# EAGLE board rocket-logger-merged (EAGLE 6.2)
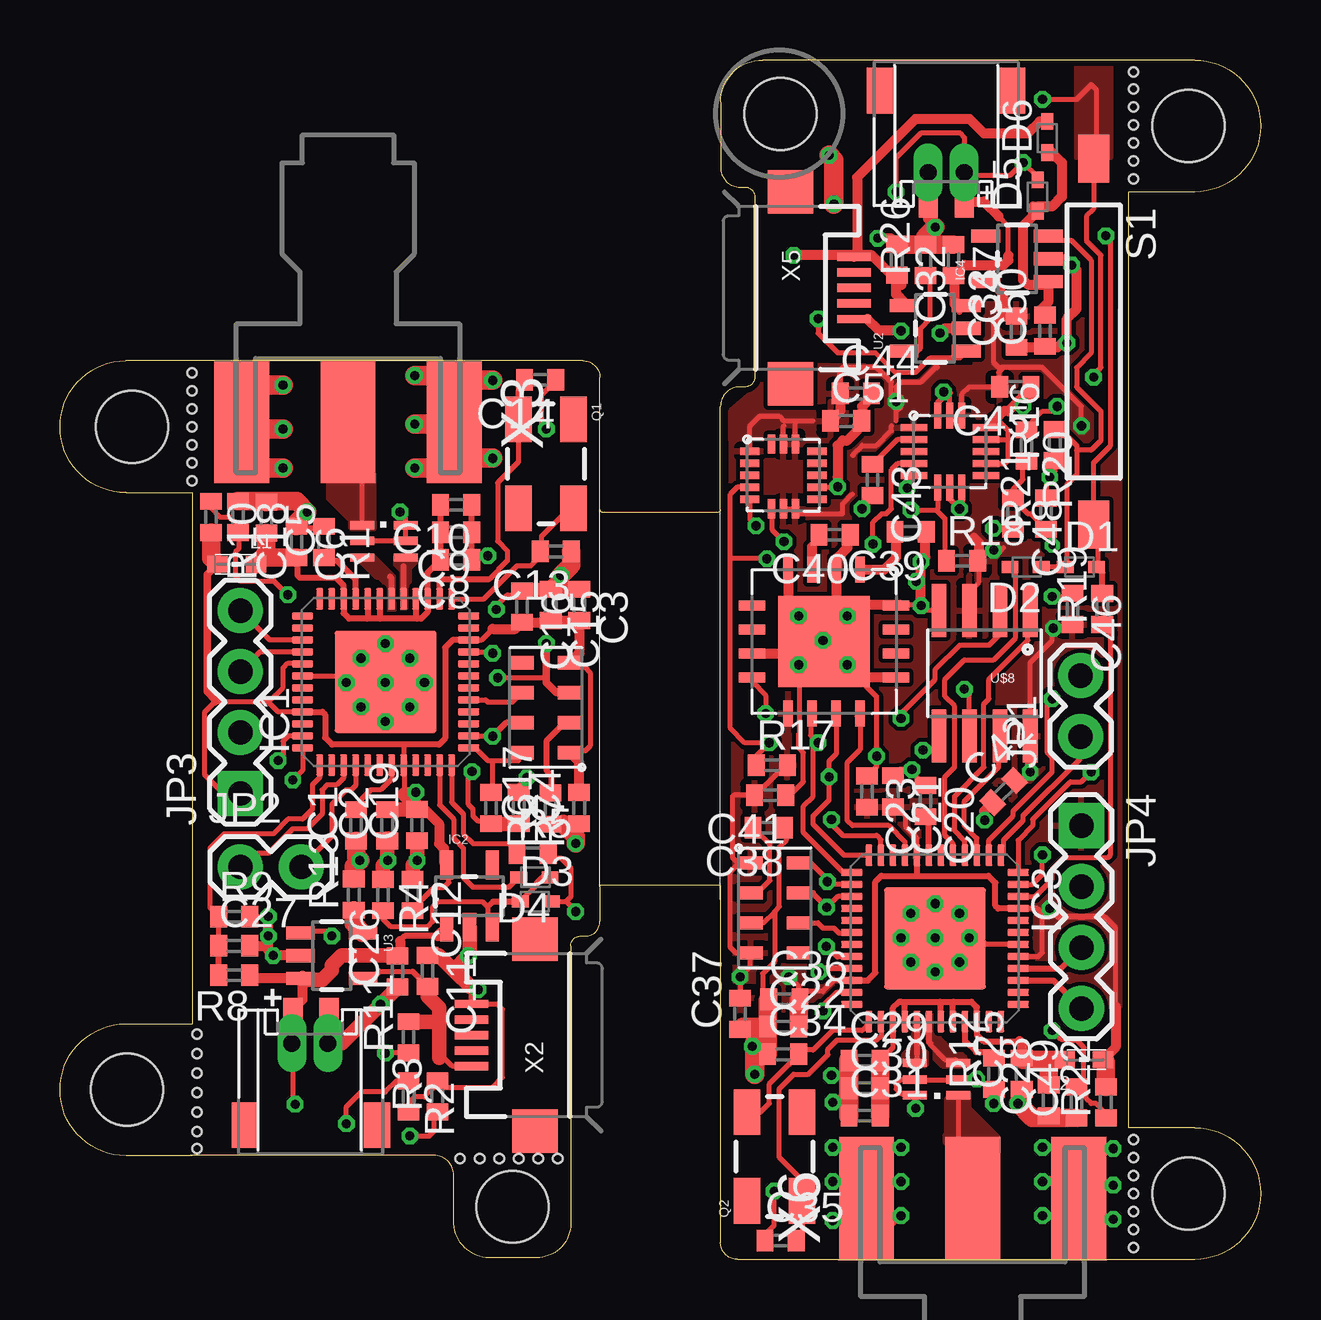
[diagram p0: board, top side]
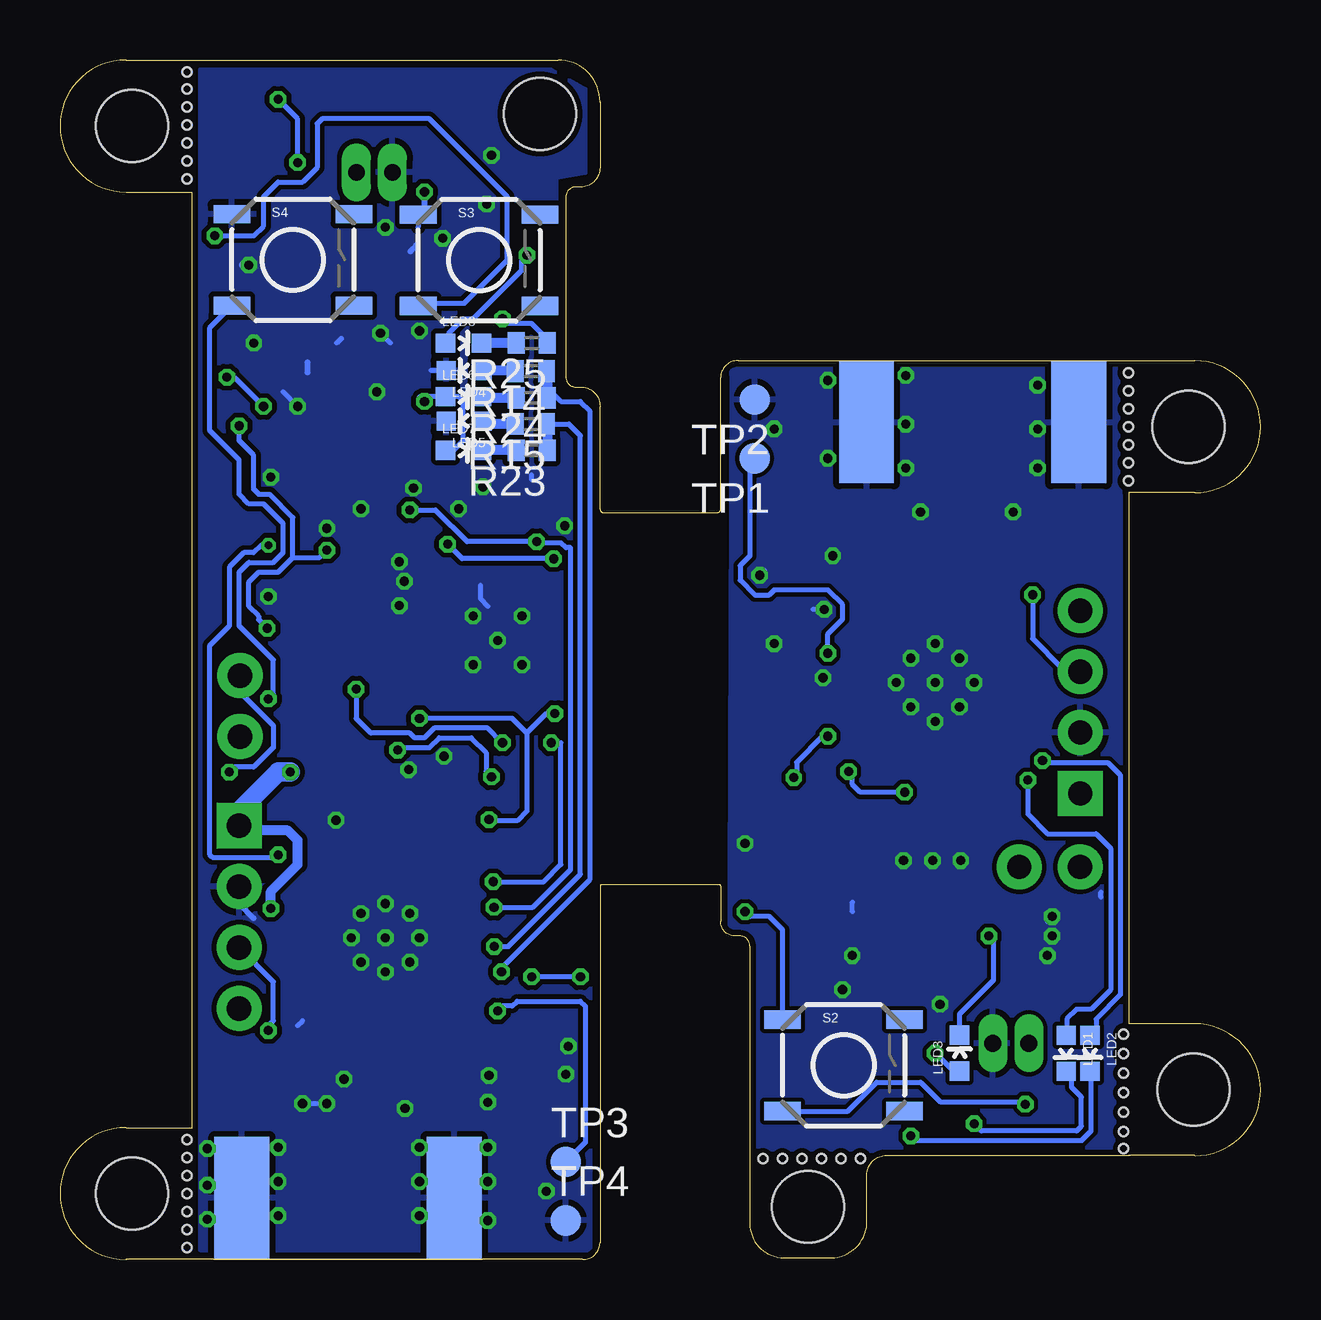
[diagram p1: board, bottom side, seen from below]

Size 50.02 x 50 mm. Coordinates in mm from the lower left corner, seen from the top.
Outline: 5.43,4.34 15.59,4.34 arc-90 16.4,3.53 16.4,1.49 arc90 18.03,0.07 19.86,0.07 arc90 21.28,1.49 21.28,13.08 arc-90 21.69,13.48 21.89,13.48 arc90 22.5,14.08 22.5,15.57 arc-90 22.54,15.61 27.52,15.61 27.52,0.7 arc90 28.24,0 47.28,0
Outline: 2.75,4.34 5.5,4.34
Outline: 2.75,4.33 arc-90 0,7.08 arc-90 2.75,9.83 5.5,9.83 5.5,31.96 2.75,31.96 arc-90 0,34.71 arc-90 2.75,37.47 21.77,37.47 arc-90 22.5,36.77 22.5,31.27 arc90 22.62,31.14 27.39,31.14 arc90 27.52,31.27 27.52,35.56 arc-90 28.34,36.37 28.54,36.37 arc90 28.95,36.78 28.95,44.3 arc90 28.54,44.7 28.34,44.7 arc-90 27.52,45.52 27.52,48.25 arc-90 29.27,50 47.27,50 arc-90 50.02,47.25 arc-90 47.27,44.5 44.52,44.5 44.52,5.5 47.27,5.5 arc-90 50.02,2.75 arc-90 47.27,0
Copper layers (1*16): Top 0.035mm / dielectric 1.5mm / Bottom 0.035mm
Design rules: minimum track width 6mil, minimum drill 12mil, track to track 6mil, track to pad 6mil, pad to pad 6mil, via to via 6mil, smd to smd 0mil, copper to edge 10mil, drill to drill 10mil, minimum pad ring 10mil, minimum via ring 6mil, stop-mask expansion 2mil, vias tented up to drill 25mil, thermal gap 10mil
Holes 3 mm at 3,34.71 18.85,2.2 2.8,7.08 30.02,47.75 47.02,2.75 47.02,47.25
Holes 0.38 mm at 5.5,32.46 5.5,33.21 5.5,33.96 5.5,34.71 5.5,35.46 5.5,36.21 5.5,36.96 16.68,4.2 17.49,4.2 18.3,4.2 19.11,4.2 19.93,4.2 20.74,4.2 5.7,4.62 5.7,5.33 5.7,6.15 5.7,6.96 5.7,7.77 5.7,8.59 5.7,9.4 44.73,45.05 44.73,45.8 44.73,46.55 44.73,47.3 44.73,48.05 44.73,48.8 44.73,49.5 44.73,5 44.73,4.25 44.73,3.5 44.73,2.75 44.73,2 44.73,1.25 44.73,0.5

## Footprints (pad centres in the part's own frame; a part is rotated, then mirrored left to right if it is on the bottom)
C0402 = smd 0.7 x 0.9: 1 -0.65,0; 2 0.65,0
SOD523 = smd 0.7 x 0.5: A 0.7,0; C -0.6,0
QFN48 = smd 0.9 x 0.3: 1 -3.462,2.75; 2 -3.462,2.25; 3 -3.462,1.75; 4 -3.462,1.25; 5 -3.462,0.75; 6 -3.462,0.25; 7 -3.462,-0.25; 8 -3.462,-0.75; 9 -3.462,-1.25; 10 -3.462,-1.75; 11 -3.462,-2.25; 12 -3.462,-2.75; 25 3.462,-2.75; 26 3.462,-2.25; 27 3.462,-1.75; 28 3.462,-1.25; 29 3.462,-0.75; 30 3.462,-0.25; 31 3.462,0.25; 32 3.462,0.75; 33 3.462,1.25; 34 3.462,1.75; 35 3.462,2.25; 36 3.462,2.75 | smd 0.3 x 0.9: 13 -2.75,-3.462; 14 -2.25,-3.462; 15 -1.75,-3.462; 16 -1.25,-3.462; 17 -0.75,-3.462; 18 -0.25,-3.462; 19 0.25,-3.462; 20 0.75,-3.462; 21 1.25,-3.462; 22 1.75,-3.462; 23 2.25,-3.462; 24 2.75,-3.462; 37 2.75,3.462; 38 2.25,3.462; 39 1.75,3.462; 40 1.25,3.462; 41 0.75,3.462; 42 0.25,3.462; 43 -0.25,3.462; 44 -0.75,3.462; 45 -1.25,3.462; 46 -1.75,3.462; 47 -2.25,3.462; 48 -2.75,3.462 | smd 4.25 x 4.25: EXP 0,0
SOT23-5 = smd 0.55 x 1.2: 1 -0.95,-1.3; 2 0,-1.3; 3 0.95,-1.3; 4 0.95,1.3; 5 -0.95,1.3
1X02 = drill 1.016 pad 1.88: 1 0,0; 2 2.54,0
1X04 = drill 1.016 pad 1.88 square: 1 0,0 | drill 1.016 pad 1.88: 2 2.54,0; 3 5.08,0; 4 7.62,0
0603 = smd 0.85 x 0.7: 1 -0.9,0; 2 0.7,0
LED-0603 = smd 0.8 x 0.8: A 0,-0.75; C 0,0.75
CRYSTAL-SMD-5X3 = smd 1.9 x 1.1: 1 -1.85,-1.15; 2 1.85,-1.15; 3 1.85,1.15; 4 -1.85,1.15
R0402 = smd 0.7 x 0.9: 1 -0.65,0; 2 0.65,0
CT10-G1 = smd 2 x 1.3: 1 -7.62,0; 2 7.62,0
TACTILE_SWITCH_SMD = smd 1.524 x 0.762: 1 -2.54,1.905; 2 2.54,1.905; 3 -2.54,-1.905; 4 2.54,-1.905
B1,27 = smd 1.27 x 1.27: TP 0,0
JST-ZR-2 = drill 0.7 pad 1.016 long: 1 0.75,0; 2 -0.75,0
JST-ZR-2-SMD = smd 0.8 x 2.2: 1 0.6,-1.1; 2 -0.9,-1.1 | smd 1.1 x 1.9: TB1 -2.9,3.1; TB2 2.6,3.1
LGA16 = smd 0.8 x 0.323: 1 -1.4,1; 2 -1.4,0.5; 3 -1.4,0; 4 -1.4,-0.5; 5 -1.4,-1; 9 1.4,-1; 10 1.4,-0.5; 11 1.4,0; 12 1.4,0.5; 13 1.4,1 | smd 0.323 x 0.8: 6 -0.5,-1.4; 7 0,-1.4; 8 0.5,-1.4; 14 0.5,1.3; 15 0,1.3; 16 -0.5,1.3
LGA8 = smd 1 x 0.55: 1 -1,1.875; 2 -1,0.625; 3 -1,-0.625; 4 -1,-1.875; 5 1,-1.875; 6 1,-0.625; 7 1,0.625; 8 1,1.875
QFN16-6X6 = smd 1.1 x 0.4: 1 -3,1.5; 2 -3,0.5; 3 -3,-0.5; 4 -3,-1.5; 9 3,-1.5; 10 3,-0.5; 11 3,0.5; 12 3,1.5 | smd 0.4 x 1.1: 5 -1.5,-3; 6 -0.5,-3; 7 0.5,-3; 8 1.5,-3; 13 1.5,3; 14 0.5,3; 15 -0.5,3; 16 -1.5,3 | smd 3.8 x 3.8: 17 0,0
QFN16-COL = smd 1.1 x 0.3: 1 -1.5,1; 2 -1.5,0.5; 3 -1.5,0; 4 -1.5,-0.5; 5 -1.5,-1; 9 1.5,-1; 10 1.5,-0.5; 11 1.5,0; 12 1.5,0.5; 13 1.5,1 | smd 0.3 x 1.1: 6 -0.5,-1.5; 7 0,-1.5; 8 0.5,-1.5; 14 0.5,1.5; 15 0,1.5; 16 -0.5,1.5
SO08 = smd 0.61 x 2.21: 1 -1.905,-2.616; 2 -0.635,-2.616; 3 0.635,-2.616; 4 1.905,-2.616; 5 1.905,2.616; 6 0.635,2.616; 7 -0.635,2.616; 8 -1.905,2.616
0896BM15A0001 = smd 0.35 x 1: 1 0.65,0.9; 2 0,0.9; 3 -0.7,0.9; 4 -0.7,-0.9; 5 0,-0.9; 6 0.65,-0.9
USB-MICROB = smd 0.35 x 1.4: D+ 0,2.65; D- -0.65,2.65; GND 1.3,2.65; ID 0.65,2.65; VBUS -1.3,2.65 | smd 1.8 x 1.9: MT1 -4,0; MT2 4,0
J502-ND-142-0701-801/806 = smd 5.08 x 2.286: 1 2.565,0; G@1 2.565,4.42; G@2 2.565,-4.42 | smd 5.08 x 2.286 bottom: G@3 2.565,4.42; G@4 2.565,-4.42

## Placement (x,y rotation side)
C1  [C0402]  12.34,18.1 90 top
C2  [C0402]  13.64,18.1 90 top
C3  [C0402]  21.64,27.29 270 top
C4  [C0402]  21.63,18.82 90 top
C5  [C0402]  8.6,30.93 270 top
C6  [C0402]  9.85,29.91 270 top
C8  [C0402]  16.5,29.16 180 top
C9  [C0402]  16.5,30.31 180 top
C10  [C0402]  16.5,31.46 180 top
C11  [C0402]  15.32,12.03 270 top
C12  [C0402]  14.69,15.2 270 top
C13  [C0402]  20.66,29.51 180 top
C14  [C0402]  20,36.66 180 top
C15  10u  [C0402]  20.45,27.29 270 top
C16  100n  [C0402]  19.25,27.21 270 top
C17  [C0402]  20.44,18.8 90 top
C18  [C0402]  7.41,30.96 270 top
C19  [C0402]  14.88,18.11 90 top
C20  [C0402]  36.06,19.11 270 top
C21  [C0402]  34.71,19.52 270 top
C22  [C0402]  30.13,9.7 0 top
C23  [C0402]  33.62,19.51 270 top
C25  [C0402]  40.07,7.75 90 top
C26  [C0402]  14.07,12.01 90 top
C27  [C0402]  7.26,13.08 0 top
C28  [C0402]  41.2,6.64 90 top
C29  [C0402]  33.52,8.3 0 top
C30  [C0402]  33.52,7.15 0 top
C31  [C0402]  33.52,6 0 top
C32  [C0402]  34.87,41.68 270 top
C33  [C0402]  39.85,38.67 90 top
C34  [C0402]  30.13,8.56 0 top
C35  [C0402]  30.02,0.8 0 top
C36  10u  [C0402]  30.18,10.85 0 top
C37  100n  [C0402]  28.34,10.25 90 top
C38  [C0402]  29.52,18 180 top
C39  1u  [C0402]  35.44,30.33 180 top
C40  1u  [C0402]  32.27,30.2 180 top
C41  100n  [C0402]  29.59,19.36 180 top
C42  4.7u  [C0402]  39.32,19.5 45 top
C43  100n  [C0402]  33.86,32.5 270 top
C44  100n  [C0402]  33.16,36.1 0 top
C45  [C0402]  39.81,36.37 180 top
C46  [C0402]  42.19,27.12 270 top
C47  [C0402]  37.23,41.66 270 top
C48  [C0402]  39.72,31.09 270 top
C49  [C0402]  42.36,6.55 90 top
C50  [C0402]  41.04,38.71 90 top
C51  [C0402]  32.76,34.95 0 top
D1  [SOD523]  42.48,28.87 0 top
D2  [SOD523]  40.28,28.87 180 top
D3  [SOD523]  19.78,14.92 0 top
D4  [SOD523]  19.81,15.94 180 top
D5  [SOD523]  40.73,44.3 90 top
D6  [SOD523]  41.14,46.74 90 top
IC1  CC430F513X  [QFN48]  13.57,24.08 90 top
IC2  [SOT23-5]  17.07,15.15 0 top
IC3  CC430F513X  [QFN48]  36.46,13.39 270 top
IC4  [SOT23-5]  39.87,41.71 90 top
JP1  [1X02]  42.52,21.8 90 top
JP2  [1X02]  7.52,16.36 0 top
JP3  [1X04]  7.51,19.43 90 top
JP4  [1X04]  42.56,18.08 270 top
L1  [0603]  7.26,28.98 180 top
L2  [0603]  42.76,8.33 0 top
LED1  [LED-0603]  8.1,8.59 180 bottom
LED2  [LED-0603]  7.1,8.59 180 bottom
LED3  [LED-0603]  12.54,8.61 0 bottom
LED4  [LED-0603]  33.18,37.06 90 bottom
LED5  [LED-0603]  33.18,34.95 90 bottom
LED6  [LED-0603]  33.21,35.97 270 bottom
LED7  [LED-0603]  33.21,33.73 270 bottom
LED8  [LED-0603]  33.21,38.2 270 bottom
Q1  [CRYSTAL-SMD-5X3]  20.25,33.16 270 top
Q2  [CRYSTAL-SMD-5X3]  29.77,4.3 90 top
R1  [R0402]  11,29.91 270 top
R2  [R0402]  14.53,6.8 270 top
R3  [R0402]  15.72,6.81 90 top
R4  [R0402]  13.45,15.19 270 top
R5  [R0402]  19.7,16.93 0 top
R6  [R0402]  17.96,18.82 270 top
R7  [R0402]  19.11,18.82 270 top
R8  [R0402]  7.26,11.86 180 top
R9  [R0402]  7.26,14.3 0 top
R10  [R0402]  6.29,30.96 270 top
R11  [R0402]  14.52,9.27 90 top
R12  [R0402]  38.92,7.75 90 top
R13  [R0402]  12.24,15.21 90 top
R14  [R0402]  30.4,37.03 180 bottom
R15  [R0402]  30.4,34.83 180 bottom
R16  [R0402]  41.45,33.95 90 top
R17  [R0402]  29.66,20.6 0 top
R18  [R0402]  37.58,29.12 0 top
R19  [R0402]  43.43,27.12 90 top
R20  [R0402]  40.27,33.93 270 top
R21  [R0402]  41.09,31.09 90 top
R22  [R0402]  43.58,6.55 90 top
R23  [R0402]  30.37,33.73 180 bottom
R24  [R0402]  30.37,35.92 180 bottom
R25  [R0402]  30.37,38.2 180 bottom
R26  [R0402]  36.06,41.66 90 top
S1  REED-SWITCH-CT10-1530-G1  [CT10-G1]  43.07,38.26 270 top
S2  SWITCH-MOMENTARY-2SMD  [TACTILE_SWITCH_SMD]  17.37,8.09 0 bottom
S3  SWITCH-MOMENTARY-2SMD  [TACTILE_SWITCH_SMD]  32.56,41.65 0 bottom
S4  SWITCH-MOMENTARY-2SMD  [TACTILE_SWITCH_SMD]  40.32,41.67 0 bottom
TP1  PTR1B1,27  [B1,27]  21.08,33.4 180 bottom
TP2  PTR1B1,27  [B1,27]  21.08,35.83 180 bottom
TP3  PTR1B1,27  [B1,27]  28.95,4.06 0 bottom
TP4  PTR1B1,27  [B1,27]  28.95,1.63 0 bottom
U2  MCP73831  [SOT23-5]  36.46,38.81 90 top
U3  MCP73831  [SOT23-5]  11.32,12.67 270 top
U$1  JST-ZR-2  [JST-ZR-2]  10.41,9.01 180 top
U$2  JST-ZR-2SMD  [JST-ZR-2-SMD]  10.31,8.71 180 top
U$3  MAX21000  [LGA16]  30.14,32.69 0 top
U$4  MPL5115A2  [LGA8]  20.24,23 180 top
U$5  MMA68XX  [QFN16-6X6]  31.83,25.76 270 top
U$6  MMA8452Q  [QFN16-COL]  37.08,33.68 0 top
U$7  MPL5115A2  [LGA8]  29.78,14.66 0 top
U$8  SPI_FLASH-X25XXSMD  [SO08]  38.52,24.44 180 top
U$9  JST-ZR-2  [JST-ZR-2]  36.92,45.31 0 top
U$10  JST-ZR-2SMD  [JST-ZR-2-SMD]  37.07,45.62 0 top
X1  0896BM15A0001  [0896BM15A0001]  13.5,29.96 90 top
X2  USB-MICROB  [USB-MICROB]  19.8,9.36 90 top
X3  SMA-142-0701-801/806  [J502-ND-142-0701-801/806]  12,37.46 270 top
X4  0896BM15A0001  [0896BM15A0001]  36.52,7.5 270 top
X5  USB-MICROB  [USB-MICROB]  30.43,40.5 270 top
X6  SMA-142-0701-801/806  [J502-ND-142-0701-801/806]  38.02,0 90 top

## Library data of the parts
C1-C6 C8-C23 C25-C51 = resistor
D1-D6 = diode
IC1 IC3 U$1-U$7 U$9 U$10 X1 X4 = Mine
IC2 IC4 JP1-JP4 LED1-LED8 Q1 Q2 S2-S4 U$8 X2 X5 = SparkFun
L1 L2 = wuerth-elektronik
R1-R26 = rcl
S1 = switch-reed; MF: COTO TECHNOLOGY; MPN: CT10-1530-G1; OC_FARNELL: 1081696
TP1-TP4 = testpad
U2 U3 = SparkFun-PowerIC; PROD_ID: IC-09995
X3 X6 = con-coax; MF: JOHNSON COMPONENTS; MPN: 142-0701-801; OC_FARNELL: 1608592; OC_NEWARK: 90F2624

## Nets
+3V1: C21.2 C22.2 C23.2 C33.2 C36.2 C37.2 C41.2 C42.2 C44.1 C45.2 C46.2 C51.1 IC3.8 IC3.22 IC3.41 IC3.45 IC4.5 JP4.1 L2.2 LED6.A LED7.A R17.2 R18.2 R22.2 U$3.1 U$3.7 U$3.8 U$3.14 U$3.15 U$5.9 U$6.1 U$6.14 U$7.1 U$7.4 U$8.3 U$8.8
+3V3: C2.2 C3.2 C4.2 C12.2 C15.2 C16.2 C19.2 IC1.8 IC1.22 IC1.41 IC1.45 IC2.5 JP3.1 L1.2 R6.2 R7.2 R10.2 U$4.1 U$4.4
AVCC_RF1: C25.2 C28.2 C29.2 C30.2 C31.2 IC3.27 IC3.28 IC3.31 IC3.32 IC3.34 L2.1
AVCC_RF2: C5.2 C6.2 C8.2 C9.2 C10.2 IC1.27 IC1.28 IC1.31 IC1.32 IC1.34 L1.1
CLK: IC3.13 U$5.10 U$8.6
CS: IC3.9 U$5.12
CS_F: IC3.4 U$8.1
DSYNC: U$3.12
GND: C1.1 C2.1 C3.1 C4.1 C5.1 C6.1 C8.1 C9.1 C10.1 C11.1 C12.1 C13.1 C14.1 C15.1 C16.1 C17.1 C18.1 C19.1 C26.1 C27.2 IC1.42 IC1.EXP IC2.2 JP3.2 R1.1 R2.2 R3.2 R4.1 R9.2 R13.2 TP2.TP U3.2 U$1.2 U$2.2 U$4.3 X1.2 X1.5 X1.6 X2.GND X3.G@1 X3.G@2 X3.G@3 X3.G@4
GND1: C20.1 C21.1 C22.1 C23.1 C25.1 C28.1 C29.1 C30.1 C31.1 C32.1 C33.1 C34.1 C35.1 C36.1 C37.1 C38.1 C39.1 C40.1 C41.1 C42.1 C43.2 C44.2 C45.1 C46.1 C47.1 C48.2 C49.1 C50.1 C51.2 IC3.42 IC3.EXP IC4.2 JP4.2 LED4.C LED5.C R12.1 R16.1 R21.2 R26.2 S4.1 TP4.TP U2.2 U$3.5 U$3.10 U$5.2 U$5.4 U$5.7 U$5.13 U$5.16 U$5.17 U$6.5 U$6.7 U$6.8 U$6.10 U$6.12 U$6.13 U$6.15 U$6.16 U$7.3 U$8.4 U$9.2 U$10.2 X4.2 X4.5 X4.6 X5.GND X6.G@1 X6.G@2 X6.G@3 X6.G@4
HOLD: IC3.3 U$8.7
INT2: IC1.17 U$4.6
KEEPON: D4.A IC1.11
KEEPON1: D2.A IC3.5
MISO: IC3.11 U$5.8 U$8.2
MOSI: IC3.12 U$5.11 U$8.5
N$1: R13.1 U3.5
N$2: C26.2 IC2.1 R8.1 S2.3 U3.3 U$1.1 U$2.1
N$3: IC1.30 X1.3
N$4: IC1.29 X1.4
N$5: IC1.33 R1.2
N$6: C13.2 IC1.25 Q1.3
N$7: C14.2 IC1.26 Q1.1
N$8: X1.1 X3.1
N$9: LED1.C R2.1
N$10: LED2.C R3.1
N$11: IC1.3 JP2.1
N$12: IC1.4 JP2.2
N$13: C17.2 U$4.2
N$14: C32.2 D6.A LED8.A U2.4 X5.VBUS
N$15: LED3.A R11.1
N$16: IC1.48 LED1.A
N$17: C47.2 D5.A R20.1 S1.1 S3.1 U2.3 U$9.1 U$10.1
N$18: C11.2 R11.2 U3.4 X2.VBUS
N$19: LED3.C U3.1
N$20: IC3.30 X4.3
N$21: IC3.33 R12.2
N$22: C34.2 IC3.25 Q2.3
N$23: IC1.39 JP3.4
N$24: D3.A R5.2 S2.1
N$25: D3.C D4.C IC2.3 R4.2
N$26: C18.2 IC1.40 JP3.3 R10.1
N$27: C35.2 IC3.26 Q2.1
N$28: IC1.47 LED2.A
N$29: IC1.21 TP1.TP
N$30: X4.1 X6.1
N$31: IC3.29 X4.4
N$32: C38.2 U$7.2
N$33: C39.2 U$5.1
N$34: C40.2 U$5.3
N$35: C43.1 U$6.2
N$36: IC3.21 R14.1 R24.1
N$37: IC3.20 R15.1 R23.1
N$38: IC3.1 JP1.1
N$39: IC3.48 JP1.2
N$40: D1.A R19.2 S1.2 S3.3
N$41: D1.C D2.C IC4.3 R16.2
N$42: IC3.39 JP4.4
N$43: C49.2 IC3.40 JP4.3 R22.1
N$44: IC3.2 S4.3
N$45: IC3.23 TP3.TP
N$46: LED5.A R15.2
N$47: LED7.C R23.2
N$48: LED4.A R14.2
N$49: LED6.C R24.2
N$50: LED8.C R25.2
N$51: C50.2 D5.C D6.C IC4.1
N$54: R25.1 U2.1
N$55: R26.1 U2.5
P_INT: IC3.18 U$7.6
SCL: IC1.13 R6.1 U$4.8
SCL1: IC3.14 R17.1 U$3.4 U$6.4 U$7.8
SDA: IC1.14 R7.1 U$4.7
SDA1: IC3.15 R18.1 U$3.6 U$6.6 U$7.7
SWITCHON: IC1.12 R5.1
SWITCHON1: IC3.46 R19.1
VBAT: C27.1 IC1.1 R8.2 R9.1
VBAT1: C48.1 IC3.47 R20.2 R21.1
VCORE: C1.2 IC1.7
VCORE1: C20.2 IC3.7

## Tracks (layer width: path | path; a pad name or v marks a point on that pad's centre or on a via)
+3V1  (via drill 0.38)
  Top 0.203: IC3.22 32.25,11.64 31.79,11.18 30.78,11.18 | 30.31,20.87 R17.2 30.25,20.6 29.35,19.71 29.29,19.71 C41.2 28.08,19.36 28.02,19.3 28.02,16.75 28.24,16.54 U$7.1 28.31,16.54 27.92,16.15 27.93,16.14 27.93,13 28.15,12.79 U$7.4 28.75,12.75 28.75,12.2 v28.34,11.79 C37.2 | 30.37,22.73 U$5.9 | 40.33,20.12 40.33,20.32 | 40.33,20.32 40.33,20.93 | 40.33,20.93 40.33,21.74 | 40.33,21.74 40.33,21.79 | IC3.8 35.71,17.57 35.25,18.03 35.25,18.49 34.87,18.87 | v34.84,35.76 35.04,35.56 34.84,35.36 | 40.53,20.73 40.33,20.93 | 43.53,14.27 43.98,13.82 43.98,10.57 | 40.16,12.64 40.77,12.64 40.94,12.8 40.94,14.43 40.73,14.63 IC3.45 | 35.04,35.97 v34.84,35.76 | 32.65,37.19 34.03,37.19 34.64,36.58 34.64,35.97 v34.84,35.76 | v34.84,35.76 34.84,36.37 35.04,36.58 35.86,36.58 36.46,37.19 36.57,37.19 | 34.97,35.63 v34.84,35.76 | 39.31,37.19 40.94,37.19 42.56,35.56 v42.56,34.75 | 39.31,37.19 39.11,36.98 39.11,36.42 C45.2 38.3,36.37 38.29,36.37 37.89,36.37 37.58,36.06 U$6.14 | C42.2 40.07,19.96 v40.43,20.32 40.33,20.32 | 40.33,21.74 40.4,21.82 U$8.8 40.43,24.89 41.34,25.81 41.34,26.26 v41.39,26.31 41.42,26.28 42,26.28 C46.2 | 30.78,11.18 30.78,11.38 v30.37,11.79 | 30.78,11.18 30.83,11.12 C36.2 30.78,10.8 | U$3.14 30.64,34.88 30.57,34.95 | 30.57,34.95 30.17,34.95 29.96,35.15 29.15,35.15 28.74,34.74 U$3.1 | 31.38,34.95 30.57,34.95 | 39.21,39.32 39.28,39.39 39.31,39.39 | 39.31,37.19 39.11,37.19 38.9,37.39 38.9,39.01 39.11,39.22 39.54,39.22 | 39.31,29.67 39.11,29.46 38.78,29.46 | C33.2 39.82,39.32 39.72,39.22 | IC4.5 38.79,40.76 38.99,40.55 | U$3.7 U$3.8 30.84,31.09 32.6,31.09 32.6,31.5 33.01,31.9 | 34.64,34.75 34.64,34.54 34.03,33.93 33.42,33.93 33.06,33.58 33.06,33.53 33.01,33.53
  Top 0.203: 34.84,34.95 v34.84,35.76 | U$3.15 30.14,34.72 30.17,34.75 | U$8.3 37.89,27.84 38.29,28.24 38.29,29.06 R18.2
  Top 0.254: IC3.22 33.66,11.64 33.98,11.95 33.98,15.75 34.23,16 35.65,16 | IC3.45 39.09,14.64 38.98,14.75 38.98,15.7 38.68,16 35.65,16 | IC3.41 40.16,12.64 | JP4.1 42.56,17.68 | 43.53,14.27 41.6,14.27 v41.24,14.63 41.04,14.43 40.94,14.43 | IC3.8 35.71,16.06 35.65,16 | C44.1 32.51,37.05 32.65,37.19
  Top 0.406: 38.99,40.55 39.31,40.23 39.31,39.39 | C33.2 39.21,39.32 | 38.29,29.27 38.29,29.87 38.09,30.07 | C44.1 32.51,35.35 C51.1 | 43.98,10.57 43.98,8.85 L2.2
  Top 0.762: 30.78,10.8 C22.2 | R22.2 43.58,8.22 L2.2
  Bottom 0.203: v28.34,11.79 v30.37,11.79 | v34.84,35.76 35.04,35.97 LED6.A 33.42,35.97 33.21,35.76 33.21,34.14 33.62,33.73 LED7.A | v42.56,34.75 42.56,34.14 41.95,33.53 41.95,32.11 41.75,31.9 41.29,31.9 40.33,30.94 40.33,29.26 | v41.39,26.31 41.75,26.67 41.75,26.82 42.15,27.23 42.15,28.24 41.75,28.65 40.94,28.65 40.33,29.26 | 40.33,29.26 39.21,29.26 v38.9,29.57
  Bottom 0.254: 42.15,17.68 JP4.1
  Bottom 0.406: v41.24,14.63 41.24,15.34 40.12,16.46 40.12,17.48 40.53,17.88 42.36,17.88 JP4.1
  Bottom 0.813: JP4.1 42.56,18.69 40.94,20.32 v40.43,20.32
  pour Top (isolate 0.178): 43.98,39.83 38.29,39.83 38.09,37.19 30.57,37.29 30.17,37.29 27.93,35.36 28.13,10.36 44.19,10.57 44.19,39.42
+3V3  (via drill 0.38)
  Top 0.203: IC1.22 17.57,25.83 18.03,26.28 | 14.37,20.67 14.37,19.58 14.47,19.48 v14.83,19.48 14.78,19.43 | IC1.45 9.09,22.83 8.68,23.24 | 8.68,23.24 6.45,23.24 6.04,22.83 6.04,20.19 6.8,19.43 JP3.1 | 8.68,23.24 9.29,23.85 9.29,24.66 9.5,24.86 10.07,24.86 IC1.41 | v17.17,20.34 17.01,20.19 17.01,18.97 17.22,18.77 17.22,18.48 17.41,18.29 17.84,18.29 R6.2 18.1,18.17 18.12,18.19 | U$4.1 21.32,21.2 21.89,21.2 22.09,21.41 22.09,24.46 21.84,24.71 21.27,24.71 21.24,24.75 U$4.4 | IC2.5 16.2,16.37 16.2,15.72 16,15.51 15.59,15.51 14.9,14.82 14.9,14.62 14.82,14.55 C12.2 | 15.17,18.77 15.18,18.77 | 15.18,18.77 15.2,18.76 | 18.15,18.16 18.12,18.19 | 18.12,17.98 18.12,18.19 | C19.2 15.17,18.76 15.18,18.77 | 15.8,21.46 14.34,21.46 14.32,21.44 IC1.8 14.37,20.67 | 14.37,20.75 14.37,20.67
  Top 0.254: IC1.22 16.36,25.83 16.05,25.51 16.05,21.71 15.8,21.46 11.34,21.46 11.05,21.76 11.05,22.71 10.93,22.83 IC1.45
  Top 0.305: 6.45,23.24 6.45,23.35 6.13,23.67 6.13,28.54 L1.2
  Top 0.406: 15.2,18.77 15.2,18.76 15.79,18.16 15.79,17.34 16,17.14 16,16.57 IC2.5 | C4.2 21.63,20.74 U$4.1 | 18.03,26.28 18.97,26.28 C16.2 20.37,26.56 C15.2 C3.2 21.64,25.28 U$4.4
  Top 0.61: C2.2 13.65,18.76 C19.2 14.88,18.87 14.37,19.38 14.73,19.38 v14.83,19.48 | R7.2 R6.2
  Top 0.762: R10.2 6.29,29.24 L1.2
  Bottom 0.203: v14.83,19.48 16.68,19.48 17.01,19.81 17.01,20.19 v17.17,20.34
AVCC_RF1
  Top 0.203: 35.02,10.75 35.19,10.75 35.21,10.73 | 34.98,10.75 35.02,10.75 35.04,10.77 36.67,10.77 36.71,10.73 | 34.71,9.28 34.71,8.83 C29.2
  Top 0.254: 34.71,9.28 IC3.27 34.71,10.48 34.98,10.75 35.02,10.75 37.23,10.75 | 37.23,10.75 37.98,10.75 38.21,10.52 IC3.34 38.21,9.36 38.47,9.1 39.98,9.1 | IC3.31 36.71,10.73 | IC3.32 37.21,10.73 37.23,10.75 | IC3.28 35.21,10.73
  Top 0.406: 39.98,9.1 40.07,9.01 C25.2 40.14,8.33
  Top 0.762: C31.2 C30.2 C29.2 | 40.14,8.33 41.14,8.33 | 41.14,8.33 L2.1 | C28.2 41.2,8.27 41.14,8.33
AVCC_RF2
  Top 0.203: 8.21,28.93 L1.1 | 14.82,26.73 14.85,26.73 14.87,26.71 | IC1.31 13.32,26.73 13.34,26.71
  Top 0.254: C10.2 C9.2 C8.2 15.32,28.63 IC1.27 15.32,26.98 15.05,26.71 14.87,26.71 13.34,26.71 12.8,26.71 | 12.8,26.71 12.05,26.71 11.82,26.94 IC1.34 11.82,28.1 11.5,28.41 10.01,28.41 9.9,28.52 9.9,29.21 C6.2 | IC1.31 13.32,26.73 | IC1.32 12.82,26.73 12.8,26.71 | IC1.28 14.82,26.73
  Top 0.762: C5.2 8.6,29.42 L1.1 8.44,29.26 9.79,29.26 C6.2
CLK  (via drill 0.38)
  Top 0.203: IC3.13 32.64,16.14 30.98,17.8 30.98,18.9 31.38,19.3 31.38,21.34 v31.59,21.54 31.27,21.85 31.27,22.7 U$5.10 | U$8.6 37.89,23.57 v37.68,23.77
  Bottom 0.203: v37.68,23.77 37.68,22.56 37.07,21.95 35.45,21.95 35.25,21.74 34.84,21.74 34.43,22.15 32.2,22.15 v31.59,21.54
CS
  Top 0.203: 33.21,22.64 U$5.12 33.33,21.25 32.81,20.73 32.81,18.29 33.01,18.08 34.53,18.08 35.21,17.41 IC3.9
CS_F
  Top 0.203: U$8.1 40.33,26.95 40.33,25.81 38.7,24.18 38.7,23.37 38.5,23.16 38.5,20.52 37.28,19.3 37.28,17.88 37.71,17.45 IC3.4
GND  (via drill 0.38)
  Top 0.203: 20.45,28.3 C15.1 20.47,27.92 20.47,27.91 | v18.23,24.25 20.26,24.25 | v13.56,24.05 13.56,24.07 IC1.EXP 13.32,24.33 IC1.42 | R9.2 v8.68,14.3 | X1.5 X1.6 | X1.2 X1.5 | X1.5 14.4,30.93 v14.17,31.16 | C17.1 20.96,18.15 21.61,18.15 C4.1 | C14.1 20.65,36.63 20.06,36.04 20.06,34.82 v20.26,34.62 | U$2.2 11.21,9.06 U$1.2 | v18.18,27.1 18.18,27.25 18.64,27.71 19.1,27.71 C16.1 | X2.GND 17.16,10.64 18.23,10.64 18.44,10.43 18.44,7.59 18.03,7.18 16,7.18 R3.2 | 15.67,7.41 15.67,7.26 15.18,6.78 14.78,6.78 14.58,6.57 14.58,6.19 R2.2 | v17.83,29.33 17.32,29.33 C8.1 | 9.85,30.46 C6.1
  Top 0.254: C8.1 C9.1 C10.1 | R1.1 11,30.46 9.85,30.46 | X2.GND 17.15,10.97 v17.42,11.25
  Top 0.305: v20.26,25.67 20.26,24.25 20.26,24.05 20.67,23.64 21.23,23.64 U$4.3
  Top 0.406: U3.2 v8.89,12.67 8.68,12.87 8.68,13.28 | 8.68,13.28 v8.68,14.3 | C27.2 8.48,13.08 8.68,13.28
  Top 0.61: 17.15,11.32 16.4,12.06 | 16.4,12.06 15.78,12.68 C11.1 | IC2.2 17.07,12.72 v17.01,12.67 16.4,12.06 | C3.1 C15.1 | C16.1 19.4,27.86 19.45,27.91 20.47,27.91 | U$1.2 11.73,9.01 v13.36,10.64 C26.1 | 15.67,7.41 R3.2 | R4.1 13.45,16.43 v13.66,16.63 13.64,16.66 C2.1 | C12.1 14.69,16.45 v14.88,16.63 C19.1
  Top 0.762: C18.1 8.57,31.61 | 8.57,31.61 C5.1 | 8.57,31.61 9.86,31.61 v10.31,31.16 9.85,30.7 C6.1 | C1.1 12.34,16.79 v12.49,16.63 12.24,16.38 R13.2 | C13.1 21.31,28.95 v20.87,28.52 | v21.48,17.34 21.48,17.63 20.96,18.15
  Top 0.813: v12.49,16.64 v12.49,16.63 | 13.65,17.46 C2.1 | v14.78,32.99 15.79,32.99 | 15.59,34.82 15.79,34.82 | v14.78,36.85 15.79,36.85 | 17.01,33.4 v18.03,33.4 | 17.01,36.65 v18.03,36.65 | 8.28,32.99 v9.29,32.99 | 8.28,36.44 v9.29,36.44 | 8.28,34.62 8.48,34.62 | X3.G@1 15.67,34.9 15.59,34.82 | 15.59,34.82 v14.78,34.82 | X3.G@4 8.2,34.9 8.48,34.62 | 8.48,34.62 v9.29,34.62
  Bottom 0.203: 6.65,15.11 6.65,15.31 | v20.87,28.52 20.67,28.72 | v18.18,27.1 18.64,27.1 | v8.68,14.3 8.89,14.09 | v10.31,31.16 10.31,31.36 | v14.17,31.16 14.17,31.36 | 17.01,14.5 17.01,14.91
  other vias: 12.54,23.03 14.58,23.03 12.54,25.07 14.58,25.07 13.56,25.67 11.93,24.05 13.56,22.42 15.18,24.05 8.68,13.48
  pour Bottom (isolate 0.178): 21.48,4.14 6.04,4.14 5.63,4.54 5.43,36.85 6.04,37.46 22.09,37.46 22.04,36.7 22.16,5.01
GND1  (via drill 0.38)
  Top 0.203: 28.49,14.04 U$7.3 29.31,14.04 29.77,14.5 | 29.77,14.5 29.77,12.41 29.27,11.91 29.27,10.9 29.32,10.85 C36.1 29.48,10.8 | 29.77,14.5 29.97,14.7 29.97,17.2 30.27,17.5 30.27,17.9 C38.1 30.24,18.06 | 36.51,27.01 36.51,27.1 | 31.33,25.26 31.43,25.36 | 31.43,25.36 U$5.17 | 34.03,20.52 v34.03,20.98 | v34.03,20.98 34.03,23.45 33.42,24.06 33.42,24.38 33.54,24.26 | C35.1 29.37,1.04 29.76,1.42 v29.76,2.84 29.76,3.05 | C30.1 32.87,7.45 | C31.1 32.87,6.03 | 38.7,7.32 38.5,7.32 38.31,7.5 X4.2 X4.5 35.02,7.5 34.84,7.32 34.84,7.11 35.04,6.91 35.65,6.91 35.65,6.88 X4.6 35.62,6.33 v35.65,6.3 | 38.7,7.32 38.81,7.32 | v41.34,27.64 42.05,27.64 C46.1 | IC3.42 38.57,13.14 38.32,13.39 IC3.EXP 36.46,13.39 v36.46,13.41 | 41.27,6.06 C28.1 41.28,5.9 | U$3.5 28.74,30.84 v29,30.58 | 28.44,9.7 C37.1 | 32.28,32.6 32.4,32.72 v32.4,32.21 32.38,32.19 U$3.10 | C48.2 38.94,30.44 v38.9,30.48 | R16.1 41.45,32.82 v41.24,32.61 41.09,32.46 R21.2 | X5.GND 32.82,39.2 32.81,39.22 | 33.62,2.64 33.62,2.84 34.64,1.83 v35.04,1.83 34.64,1.42 | U$9.2 U$10.2 | 32.33,26.26 U$5.17 | 30.33,27.26 U$5.17 | 33.35,27.28 33.26,27.18 | 33.26,27.18 U$5.17 | U$5.16 35.02,27.26 35.04,27.28 35.86,27.28 v35.88,27.25 36.08,27.05 U$8.4 36.58,27.05 36.52,27 | 32.74,29.82 32.96,29.82 | 32.4,28.83 U$5.2 | C21.1 34.97,20.42 v35.5,20.42 35.5,20.32 C20.1 | R12.1 38.7,7.32 | 31.77,25.01 | 31.77,25.01 31.43,25.36 | 32.81,7.72 32.2,7.72 v32.15,7.67 | C23.1 34.03,20.56 v34.03,20.98 | 40.12,36.03 C45.1 40.46,36.04 40.53,35.97 v40.12,35.56 | 32.74,29.82 32.74,30.18 32.76,30.2 C40.1 | 33.28,27.01 33.28,27.16 33.26,27.18 | C41.1 30.42,19.36 30.98,19.91 30.98,21.13 30.78,21.34 30.78,21.89 30.83,21.95 30.83,23.96 30.78,24.01 31.77,25.01
  Top 0.203: U$6.15 37.08,36.12 | U$6.16 36.58,35.72 | 32.74,29.82 32.81,29.88 | U$6.7 37.08,31.9 | U$6.8 37.58,31.59 | 38.9,34.95 38.65,34.95 38.65,34.75 U$6.13 | v33.42,31.29 33.42,31.41 C43.2 | v35.3,32.16 35.3,32.39 U$6.5 | U$6.10 39.36,33.18 39.51,33.32 39.51,34.14 | 39.51,34.14 39.51,34.54 39,35.05 | U$6.12 39.47,34.18 39.51,34.14 | v43.88,4.62 43.73,4.62 41.95,2.84 | v43.88,3.1 43.63,3.1 43.58,3.05 | 36.06,30.14 36.06,30.29 C39.1
  Top 0.254: 32.08,25.01 31.77,25.01 32.02,24.76 32.02,24.5 | 31.08,27.01 32.18,25.91 33.28,27.01 | 36.51,27.01 36.52,27 | X5.GND 33.64,39.2 | 37.08,31.9 37.08,31.7 v37.48,31.29 37.58,31.39 37.58,31.59 | 36.58,35.72 36.82,35.97 v36.82,36.17 37.02,36.17 37.08,36.12 | v32.2,6.55 32.28,6.55 C30.1 | 43.58,3.05 42.93,3.05 X6.G@4 42.6,2.41 42.6,2.03 42.96,1.68 v43.88,1.68
  Top 0.406: X6.G@4 42.23,2.57 41.95,2.84 41.54,3.25 v40.94,3.25 | X6.G@1 33.75,2.57 34.43,3.25 v35.04,3.25 | 42.1,41.5 v42.15,41.45 | v42.15,41.45 42.36,41.25 42.36,39.62 41.95,39.22 41.95,38.4 41.57,38.02 40.73,38.02 | 40.59,38.02 C33.1 40.73,38.02 | C25.1 39.92,6.95 v39.92,6.5 | 41.14,5.9 41.2,5.96 C28.1 41.12,5.9 40.52,5.9 | v34.08,42.57 34.63,42.57 C32.1 34.89,42.31 | 37.19,42.27 C47.1 | U$9.2 36.17,43.37 36.46,43.08 | v35.04,38.71 34.13,38.71 33.64,39.2 | U2.2 36.87,38.81 v36.67,38.61 | C50.1 40.77,38.06 40.73,38.02 | IC4.2 41.9,41.71 v42.15,41.45 | 32.4,28.83 32.4,29.26 32.81,29.67 32.81,29.88 | 36.06,30.14 36.06,29.26 35.86,29.06 35.86,27.28 | 40.12,36.03 40.12,35.97 39.51,35.36 39.31,35.36 39,35.05 38.9,34.95 | v32.4,32.21 32.4,33.93 32.6,34.14 32.81,34.14 33.21,34.54 33.21,34.76 C51.2 33.42,35.56 33.81,35.95 C44.2 | 35.04,27.28 33.35,27.28 | U$5.13 33.54,24.26 | U$5.2 32.33,27.5 32.4,27.43 32.4,26.42 v31.79,25.81 | U$5.4 30.33,27.26 | U$5.7 30.31,25.26 v30.78,24.79 | 28.95,9.04 28.95,9.7 | v38.52,18.31 38.52,18.67 38.5,18.69 38.51,18.69 C42.1
  Top 0.762: 29.48,10.8 C22.1 | 28.44,9.7 28.95,9.7 C22.1 | C34.1 C22.1 | C49.1 40.52,5.9 v39.92,6.5 | 34.89,42.31 R26.2 | R26.2 C47.1 | R26.2 36.06,42.62 v36.46,43.03
  Top 0.813: C31.1 C30.1 C29.1 | v32.25,43.99 32.25,45.82 v32.05,46.02 | v28.95,7.72 28.95,9.04
  Bottom 0.203: 30.37,32.51 30.37,32.72 | 32.51,28.11 32.51,27.54 32.2,27.23 | LED4.C 34.56,37.06 | v39.92,6.5 39.31,6.5 | v35.65,6.3 35.45,6.3 | 40.12,9.75 39.92,9.96 | v37.48,31.29 37.68,31.29 | v38.9,30.48 38.9,30.68 | v40.12,35.56 40.73,36.17 | 38.29,38.4 38.5,38.2 | v36.67,38.61 36.26,38.2
  Bottom 0.254: 39.72,37.39 39.72,36.98 | 42.56,15.44 42.56,14.83 41.95,14.22 | 35.18,42.27 35.43,42.02
  Bottom 0.406: v42.15,41.45 42.36,41.45
  other vias: 32.2,1.63 32.2,3.25 32.2,4.67 35.04,4.67 40.94,1.83 40.94,4.67 35.88,29.08 38.19,7.52 38.9,6.5 41.95,38.2 36.46,14.83 35.04,13.41 36.46,11.99 37.89,13.41 37.48,14.43 35.45,14.43 35.45,12.4 37.48,12.4 30.78,26.82 32.81,26.82 32.81,24.79 28.85,8.89 35.68,28.27
  pour Bottom (isolate 0.203): 29.56,49.58 44.19,49.58 44.19,0.41 27.93,0.41 27.93,35.56 29.35,36.37 29.35,45.11 28.13,45.31 28.13,48.77
HOLD
  Top 0.203: 39.11,22.76 39.11,21.95 39.16,21.9 U$8.7 39.11,21.77 39.11,20.52 37.68,19.1 37.68,18.08 38.21,17.56 IC3.3
INT2
  Top 0.203: IC1.17 17.74,23.33 17.83,23.24 18.85,23.24 U$4.6
KEEPON
  Top 0.203: IC1.11 15.82,18.95 16.4,18.36 16.4,17.55 16.81,17.14 16.81,15.92 17.22,15.51 18.69,15.51 D4.A
KEEPON1
  Top 0.203: 39.58,28.92 D2.A 39.61,28.84 39.82,28.84 39.82,25.91 38.9,24.99 37.68,24.99 36.87,24.18 36.87,23.47 37.28,23.06 37.28,20.52 36.87,20.12 36.87,17.68 37.21,17.34 IC3.5
MISO  (via drill 0.38)
  Top 0.203: U$5.8 28.83,24.09 29.4,23.52 v29.4,22.76 | v35.04,22.56 35.04,22.76 36.46,24.18 36.46,24.59 37.48,25.6 38.7,25.6 39.16,26.06 U$8.2 | IC3.11 34.21,17.5 34.03,17.68 32.6,17.68 32.2,18.08 32.2,18.29 v32.15,18.34
  Bottom 0.203: v29.4,22.76 29.76,22.76 30.57,21.95 | 30.57,21.95 30.57,18.69 30.98,18.29 32.1,18.29 v32.15,18.34 | 30.57,21.95 31.18,22.56 v35.04,22.56
MOSI  (via drill 0.38)
  Top 0.203: 32.27,22.7 U$5.11 32.33,21.07 32.05,20.78 v32.05,20.12 32.05,19.15 31.38,18.49 31.38,18.14 32.68,16.85 IC3.12 | 36.62,21.16 36.62,21.08 36.47,21.23 v35.96,21.23
  Top 0.305: U$8.5 36.62,21.16
  Bottom 0.203: v35.96,21.23 35.86,21.34 34.64,21.34 34.23,21.74 32.88,21.74 32.27,21.13 32.27,20.35 v32.05,20.12
N$1
  Top 0.762: R13.1 12.24,14.01 U3.5
N$2  (via drill 0.38)
  Top 0.203: 9.62,9.09 9.7,9.01 U$1.1 | U$2.1 9.71,9.06 U$1.1 | U$1.1 9.7,8.97 9.7,6.57 v9.8,6.47 | R8.1 7.91,11.9 7.97,11.96 | 10.39,11.65 10.33,11.72 U3.3 10.07,11.72 10.1,11.68
  Top 0.254: 15.74,13.48 14.37,13.48 14.17,13.28
  Top 0.406: 16.12,13.8 IC2.1 15.74,13.48 | U$2.1 9.7,9.82 9.7,10.43 10.1,10.84 10.1,11.68 10.1,11.84 | U3.3 8.21,11.72 7.97,11.96 7.87,12.06 | 14.17,13.28 14.17,12.76 C26.2
  Top 0.61: 10.09,11.65 10.39,11.65 10.92,11.65 11.32,12.06 11.32,12.26 11.73,12.67 14.06,12.67 C26.2
  Bottom 0.203: S2.3 17.2,6.19 16,7.39 14.17,7.39 13.36,6.57 9.9,6.57 v9.8,6.47
N$3
  Top 0.254: IC1.30 13.82,28.39 13.75,28.46
  pour Top (no thermals): 13.97,27.1 13.66,27.1 13.66,28.06 13.31,28.42 13.2,28.42 12.54,29.08 12.39,29.33 13.05,29.33 13.91,28.47 13.91,27.45
N$4
  Top 0.254: IC1.29 14.32,28.89
  pour Top (rank 2, no thermals): 13.97,29.33 13.97,28.62 14.12,28.47 14.12,27.2 14.17,27.15 14.42,27.15 14.47,27.2 14.47,28.16 14.58,28.27 14.58,28.82 14.83,29.08 14.83,29.28 14.73,29.33
N$5
  Top 0.203: 10.94,29.12 10.94,29.21 R1.2
  Top 0.254: IC1.33 12.32,28.35 11.55,29.12 10.94,29.12
N$6
  Top 0.203: IC1.25 17.66,27.54 19.05,28.93 19.62,28.93 20.01,29.31 C13.2 20.06,29.57 20.06,30.15 21.03,31.11 21.2,31.11 Q1.3
N$7
  Top 0.203: 17.85,28.36 17.9,28.36 18.26,28.72 18.26,28.75 18.64,29.13 18.64,29.54 18.23,29.94 18.23,32.38 19.1,33.25 Q1.1 19.1,36.21 19.35,36.46 C14.2
  Top 0.254: IC1.26 15.82,28.23 15.95,28.36 17.85,28.36
N$8
  Top 0.203: X1.1 12.6,32.73 12.14,33.19 12.14,34.76 X3.1
  pour Top (no thermals): 13.1,30.45 12.14,30.45 12.09,30.5 12.09,30.81 11.17,31.72 11.17,32.74 13.1,32.74
N$9  (via drill 0.38)
  Top 0.203: v11.93,5.66 11.93,6.37 12.54,6.98 13.56,6.98 14.02,7.45 R2.1
  Bottom 0.203: 8.1,7.61 LED1.C 7.87,7.61 7.87,7.18 7.46,6.78 7.46,5.56 7.67,5.35 11.63,5.35 v11.93,5.66
N$10  (via drill 0.38)
  Top 0.203: v14.58,5.15 15.39,5.15 15.59,5.35 15.59,6.23 15.65,6.23 R3.1
  Bottom 0.203: v14.58,5.15 14.37,4.95 7.46,4.95 7.06,5.35 7.06,7.79 LED2.C
N$11
  Top 0.203: IC1.3 11.82,20.07 11.53,19.78 11.12,19.78 10.92,19.58 10.92,18.56 10.31,17.95 9.7,17.95 8.68,16.94 8.09,16.94 JP2.1
N$12
  Top 0.203: IC1.4 12.32,19.76 12.14,19.58 11.93,19.58 11.32,18.97 11.32,17.63 JP2.2
N$13
  Top 0.203: 20.47,19.52 20.47,19.48 C17.2
  Top 0.254: U$4.2 21.03,22.38 20.26,21.61 20.26,20.39 20.47,20.19 20.47,19.52
N$14  (via drill 0.38)
  Top 0.203: 33.02,41.86 X5.VBUS
  Top 0.406: D6.A 40.82,47.44 40.33,46.94 38.5,46.94 37.89,47.55 35.65,47.55 33.21,45.11 33.21,41.93 X5.VBUS 33.14,41.86 33.82,41.86 34.74,40.94 | 35.07,40.61 34.74,40.94 | C32.2 34.82,41.03 34.74,40.94 | 34.96,40.93 C32.2 | U2.4 35.16,39.91 34.84,40.23 34.84,41 C32.2 | 33.02,41.86 v30.57,41.86
  Bottom 0.203: 34.17,38.4 LED8.A 33.82,38.34 33.82,38.61 33.21,39.22 32.81,39.22 30.78,41.25 30.78,41.66 v30.57,41.86
N$15  (via drill 0.38)
  Top 0.203: R11.1 v13.57,8.62 v13.56,8.61
  Bottom 0.203: LED3.A 12.81,7.86 v13.56,8.61
N$16  (via drill 0.38)
  Top 0.203: IC1.48 10.1,20.39 v9.7,19.99
  Bottom 0.203: v9.7,19.99 9.7,18.56 8.89,17.75 6.85,17.75 6.24,17.14 6.24,11.25 7.06,10.43 7.67,10.43 8.07,10.03 8.07,9.36 LED1.A
N$17  (via drill 0.38)
  Top 0.203: 39.11,43.48 39.51,43.08 39.51,41.86 | 37.89,44.09 37.89,44.31 U$10.1 | 41.34,35.56 v41.54,35.56 41.34,35.36 40.94,35.36 40.53,34.95 40.53,34.54 40.57,34.58 R20.1 | U$10.1 37.78,44.63 37.78,45.2 39.6,45.2 v40.12,45.72 40.73,45.11 D5.A | 37.68,44.51 U$10.1 | v43.07,36.78 43.17,36.88 43.17,36.98 43.37,37.19 43.37,41.86 42.76,42.47 42.76,43.48 43.07,43.79 S1.1 43.17,45.99 43.17,48.77 42.97,48.97 42.36,48.36 v40.94,48.36 | 37.11,40.89 C47.2 | 37.55,39.56 37.48,39.62 | v34.84,44.5 34.84,45.92 35.86,46.94 37.52,46.94 37.68,46.78 37.68,45.33 U$9.1 | U2.3 37.55,39.76 37.28,40.03
  Top 0.254: 37.48,39.62 37.48,39.5 | 37.48,44.32 U$10.1 | 37.78,45.2 U$9.1
  Top 0.406: 37.48,39.62 37.28,39.83 37.28,40.03 37.28,40.96 C47.2 37.68,41.45 39.31,41.45 39.51,41.66 39.51,41.86 | 37.89,44.09 38.5,44.09 39.11,43.48
  Bottom 0.203: v43.07,36.78 42.76,36.78 v41.54,35.56 | S3.1 35.1,43.02 | v40.12,45.72 40.12,47.55 v40.94,48.36
  Bottom 0.254: v34.84,44.5 34.84,43.81 S3.1
  pour Top (no thermals): 42.36,49.78 43.78,49.78 43.78,45.92 42.36,45.92
N$18
  Top 0.203: 17.21,8 X2.VBUS 16.34,8.06 16,8.4 15.79,8.4 | U3.4 12.88,11.72 12.95,11.65 | 13.31,12.01 14.69,12.01
  Top 0.254: 12.95,11.65 13.31,12.01 | 14.69,12.01 C11.2
  Top 0.61: 15.79,8.4 15.79,9.83 | 15.79,9.83 15.79,10.5 15.32,10.97 C11.2 15.26,11.38 15.18,11.45 | R11.2 15.7,9.92 15.79,9.83
N$19  (via drill 0.38)
  Top 0.203: v11.32,13.48 11.12,13.69 10.09,13.69 U3.1
  Bottom 0.203: LED3.C 12.54,10.23 11.12,11.65 11.12,13.28 v11.32,13.48
N$20
  Top 0.203: 36.27,9 36.27,8.93 36.87,8.33 37.29,8.33 X4.3
  Top 0.254: IC3.30 36.21,9.07 36.27,9
  pour Top (rank 2, no thermals): 36.36,10.36 36.01,10.36 35.96,9.91 35.96,8.89 36.77,8.08 37.73,8.08 37.73,8.38 37.58,8.53 37.33,8.53 36.46,9.4 36.46,9.86
N$21
  Top 0.203: 38.78,8.65 38.92,8.5 R12.2
  Top 0.254: IC3.33 37.71,9.11 38.17,8.65 38.78,8.65
N$22
  Top 0.203: 30.98,8.53 30.78,8.53 30.8,8.56 C34.2 30.4,8.18 30.4,8.13 30.37,8.13 29.56,7.32 29.56,6.5 29.2,6.15 Q2.3 | IC3.25 33.71,9.84 33.42,9.55 32.2,9.55 31.38,8.74 31.01,8.74
  Top 0.254: 30.61,8.33 31.01,8.74 30.96,8.74 C34.2
N$23
  Top 0.203: IC1.39 8.73,25.83 JP3.4
N$24  (via drill 0.38)
  Top 0.203: R5.2 20.47,16.93 20.67,16.73 20.87,16.73 21.28,16.33 21.28,15.11 21.09,14.92 | v21.48,14.5 21.48,14.53 21.09,14.92 | D3.A 21.09,14.92
  Bottom 0.203: S2.1 19.91,13.74 20.47,14.3 21.28,14.3 v21.48,14.5
N$25
  Top 0.203: 17.83,14.7 17.83,13.84 IC2.3 | 18.05,14.92 17.83,14.7 | D4.C 20.08,15.94 19.86,15.72 19.86,15.6 D3.C | 17.83,14.7 17.62,14.91 15.74,14.91 15.54,14.7 15.54,14.09 15.34,13.89 13.76,13.89 13.45,14.2 R4.2
  Top 0.254: 18.05,14.92 D3.C
N$26  (via drill 0.38)
  Top 0.203: v9.5,27.71 8.91,28.29 7.49,28.29 7.31,28.47 7.31,29.48 7.46,29.64 7.46,30.26 C18.2 7.26,30.46 7.26,30.75 7.06,30.96 6.65,30.96 6.29,31.31 R10.1 | IC1.40 8.33,25.33 JP3.3
  Bottom 0.203: v9.5,27.71 9.5,25.88 8.28,24.66 7.55,24.66 7.55,24.55 JP3.3
N$27
  Top 0.203: IC3.26 34.23,9.9 34.23,9.35 34.03,9.15 32.38,9.15 31.99,8.77 31.99,8.53 31.18,7.72 30.57,7.72 29.96,7.11 29.96,4.27 30.98,3.25 30.98,2.5 Q2.1 30.92,1.05 C35.2
N$28  (via drill 0.38)
  Top 0.203: IC1.47 9.51,21.83 9.29,21.61 9.29,21 v9.09,20.8
  Bottom 0.203: v9.09,20.8 8.99,20.7 6.35,20.7 5.84,20.19 5.84,11.04 6.85,10.03 6.85,9.59 LED2.A
N$29  (via drill 0.38)
  Top 0.203: IC1.21 17.97,25.33 v18.03,25.27
  Bottom 0.203: TP1.TP 21.28,33.19 21.28,29.33 21.69,28.93 21.69,28.32 21.08,27.71 20.47,27.71 20.26,27.91 18.03,27.91 17.42,27.3 17.42,26.69 18.03,26.08 v18.03,25.27
N$30
  Top 0.203: X4.1 37.42,4.93 38.09,4.27 38.09,2.63 X6.1
  pour Top (no thermals): 37.89,6.91 37.89,6.3 39.11,5.08 39.11,4.47 37.28,4.47 36.87,4.88 36.87,5.18 36.92,5.23 36.92,6.71 37.07,6.86
N$31
  Top 0.203: 35.71,8.57 35.71,8.28 X4.4
  Top 0.254: IC3.29 35.71,8.57
  pour Top (no thermals): 35.86,9.96 35.86,8.94 36.11,8.69 36.11,8.13 36.06,8.08 35.3,8.08 35.14,8.23 35.14,8.53 35.55,8.94 35.55,9.86 35.6,9.91
N$32
  Top 0.203: U$7.2 29.06,15.29 29.57,15.8 29.57,17.3 C38.2
N$33
  Top 0.203: 33.43,28.85 U$5.1 | 34.84,30.07 34.69,30.07 34.69,30.23 C39.2
  Top 0.406: U$5.1 34.34,28.76 34.84,29.26 34.84,30.07 34.84,30.13
N$34
  Top 0.203: C40.2 31.62,30 31.33,29.71
  Top 0.406: U$5.3 31.33,29.71
N$35
  Top 0.203: U$6.2 34.88,34.18 C43.1
N$36  (via drill 0.38)
  Top 0.203: 31.64,12.14 31.64,12.01 v31.63,12
  Top 0.254: IC3.21 31.76,12.14 v31.63,12
  Bottom 0.203: R14.1 29.75,36.36 29.15,35.76 28.34,35.76 27.93,35.36 27.93,15.85 31.63,12.15 v31.63,12
  Bottom 0.406: R14.1 29.72,37.03 R24.1
N$37  (via drill 0.38)
  Top 0.254: IC3.20 32.39,12.64 31.98,13.05 v31.93,13.05
  Bottom 0.203: v31.93,13.05 31.34,13.05 28.34,16.05 28.34,34.34 28.82,34.83 29.72,34.83
  Bottom 0.406: R15.1 29.72,34.83 R23.1
N$38
  Top 0.203: 39.23,16.87 IC3.1 39.31,16.95 39.31,17.48 40.12,18.29 40.12,18.49 42.52,20.89 JP1.1
N$39  (via drill 0.38)
  Top 0.203: IC3.48 39.92,17.48 40.53,18.08 40.53,18.34 42.1,19.91 42.56,19.91 v42.97,20.32 | IC3.48
  Bottom 0.203: JP1.2 42.52,23.64 41.14,22.25 41.14,21.34 41.95,20.52 42.76,20.52 v42.97,20.32
N$40  (via drill 0.38)
  Top 0.203: 43.58,42.47 v43.58,42.67 43.78,42.47 43.78,33.93 43.07,33.22 S1.2 43.27,30.44 43.27,28.96 D1.A 43.33,28.73
  Top 0.254: R19.2 43.43,28.62 D1.A
  Bottom 0.203: S3.3 35,39.85 33.19,39.85 31.38,41.66 31.38,44.3 34.64,47.55 39.11,47.55 39.31,47.35 39.31,45.52 39.92,44.91 40.94,44.91 41.54,44.3 41.54,43.08 41.95,42.67 v43.58,42.67
N$41
  Top 0.203: D2.C D1.C 41.97,28.87 41.95,28.85 41.95,32.31 42.36,32.72 42.36,33.73 | R16.2 41.69,34.6 42.36,33.93 42.36,33.73 | 42.36,33.73 42.97,33.73 43.37,34.14 43.37,35.36 42.36,36.37 42.36,37.19 42.97,37.8 42.97,41.66 42.15,42.47 41.19,42.47 41.19,42.64 IC4.3
N$42
  Top 0.203: JP4.4 42.52,10.46
  Top 0.254: IC3.39 41.39,11.64 JP4.4
N$43  (via drill 0.38)
  Top 0.203: v41.34,9.55 41.71,9.18 41.91,9.18 41.95,9.14 42.36,9.14 42.66,8.84 42.66,7.51 C49.2 42.61,6.95 42.76,6.95 42.76,6.71 42.97,6.5 43.17,6.5 43.58,6.1 R22.1
  Top 0.254: IC3.40 41.69,12.14 JP4.3
  Bottom 0.203: v41.34,9.55 41.54,9.55 41.14,9.96 41.14,11.58 JP4.3
N$44  (via drill 0.38)
  Top 0.203: IC3.2 38.71,17.47 38.7,17.48 39.72,18.49 39.72,18.69 41.34,20.32 41.34,20.93 41.14,21.13 41.14,23.16 v41.34,23.37
  Bottom 0.203: v41.34,23.37 41.14,23.57 41.14,24.99 42.56,26.42 42.56,28.65 42.15,29.06 41.14,29.06 40.73,29.46 40.73,30.68 41.54,31.5 42.15,31.5 42.56,31.9 42.56,33.32 43.78,34.54 43.78,38.84 S4.3
N$45  (via drill 0.38)
  Top 0.203: IC3.23 32.36,11.14 31.79,10.57 v31.79,10.36
  Bottom 0.203: 28.74,4.27 TP3.TP 28.13,4.88 28.13,10.57 28.34,10.77 30.98,10.77 31.18,10.57 31.59,10.57 v31.79,10.36
N$46
  Bottom 0.406: R15.2 32.31,34.83 LED5.A
N$47
  Bottom 0.406: R23.2 LED7.C
N$48
  Bottom 0.203: 31.08,37.06 R14.2
  Bottom 0.406: 31.08,37.06 LED4.A
N$49
  Bottom 0.406: R24.2 32.41,35.92 LED6.C
N$50
  Bottom 0.406: R25.2 LED8.C
N$51
  Top 0.203: 40.54,43.9 D5.C
  Top 0.254: D5.C 40.73,43.88 40.74,43.89
  Top 0.406: D6.C 41.33,46.14 41.75,45.72 41.75,44.3 41.34,43.89 40.74,43.89 | 40.54,43.9 40.54,43.49 40.12,43.08 40.12,40.84 40.33,40.64 41.09,40.64 41.17,40.73 IC4.1 41.17,39.9 40.83,39.56 C50.2
N$52
  cutout Top: 36.26,35.15 37.89,35.15 38.29,34.75 38.29,33.32 37.68,32.72 36.26,32.72 35.86,33.12 35.86,34.75
N$53
  cutout Top: 33.82,16.46 39.51,16.46 39.92,16.05 39.92,11.18 39.11,10.36 33.82,10.36 33.21,10.97 33.21,16.26
N$54  (via drill 0.38)
  Top 0.178: 33.98,37.8 34.79,36.98
  Top 0.203: 34.79,36.98 35.65,36.98 36.26,37.59 37.5,37.59 U2.1 | v31.59,39.22 31.59,38.61 32.4,37.8 33.98,37.8
  Bottom 0.203: R25.1 29.72,38.36 30.37,39.01 31.38,39.01 v31.59,39.22
N$55
  Top 0.203: 36.06,40.8 R26.1 36.26,40.8 36.26,39.22 35.86,38.81 35.86,38 35.72,37.86 U2.5
P_INT
  Top 0.203: U$7.6 31.57,14.04 31.79,13.82 32.25,13.82 32.45,13.61 32.97,13.61 IC3.18 32.62,13.64
SCL
  Top 0.203: IC1.13 17.3,21.33 17.83,20.8 18.03,20.8 | 18.03,20.8 19.11,20.8 19.11,21 U$4.8 | R6.1 17.96,19.71 18.03,19.78 18.03,20.8
SCL1  (via drill 0.38)
  Top 0.203: U$7.8 31.29,16.54 31.97,15.85 v31.97,15.75 32.09,15.64 IC3.14 | 27.93,29.26 27.93,22.15 28.54,21.54 v29.56,21.54 29.01,20.99 R17.1 | 27.93,29.26 27.93,31.9 28.22,32.19 U$3.4 | v29.45,29.21 27.98,29.21 27.93,29.26 | v33.87,29.82 33.87,30.73 34.23,31.09 34.43,31.09 34.64,31.29 34.64,32.92 34.89,33.18 U$6.4
  Bottom 0.203: v29.56,21.54 29.15,21.54 29.15,16.46 29.86,15.75 v31.97,15.75 | v33.87,29.82 33.26,29.21 v29.45,29.21
SDA  (via drill 0.38)
  Top 0.203: IC1.14 18.02,21.83 v18.03,21.81 | R7.1 19.11,19.75 v19.45,20.09
  Top 0.254: U$4.7 18.59,22.38 v18.03,21.81
  Bottom 0.203: v18.03,21.81 18.25,21.81 19.34,20.73 19.34,20.2 v19.45,20.09
SDA1  (via drill 0.38)
  Top 0.203: 31.39,15.29 U$7.7 31.34,15.29 v31.94,14.68 32.4,15.14 IC3.15 | v30.17,29.92 29.66,30.43 29.66,30.99 29.64,31 U$3.6 | U$6.6 36.58,31.3 36.52,31.24 | R18.1 36.87,29.19 36.87,30.89 36.52,31.24 | v35.45,31.24 36.52,31.24
  Bottom 0.203: v31.94,14.68 30.32,14.68 28.74,16.26 28.74,29.67 28.95,29.67 29.15,29.87 30.11,29.87 v30.17,29.92 33.06,29.92 34.38,31.24 v35.45,31.24
SWITCHON
  Top 0.203: IC1.12 16.32,19.06 16.81,18.56 16.81,17.75 17.22,17.34 18.84,17.34 19.05,17.14 R5.1
SWITCHON1
  Top 0.203: IC3.46 40.63,15.14 41.34,15.85 41.34,16.26 41.85,16.76 43.68,16.76 43.78,16.87 43.78,26.06
  Top 0.254: 43.78,26.06 43.78,26.12 R19.1
VBAT
  Top 0.203: C27.1 R9.1 6.24,14.66 6.24,17.14 6.85,17.75 8.89,17.75 9.5,18.36 10.1,18.36 10.51,18.77 10.51,19.78 10.82,20.09 IC1.1
  Top 0.254: R8.2 C27.1
VBAT1  (via drill 0.3, 0.38)
  Top 0.203: IC3.47 40.52,15.64 40.94,16.05 v40.94,16.87 | R20.2 40.12,33.13 40.12,32.51 39.72,32.11 C48.1 39.72,31.7 40.33,31.09 40.44,31.09 R21.1 41.34,30.19 v41.34,29.77
  Bottom 0.203: v41.34,29.77 41.65,29.77 41.95,29.46 42.36,29.46 42.97,28.85 42.97,26.42 43.78,25.6 43.78,16.87 43.68,16.76 41.04,16.76 v40.94,16.87
VCORE
  Top 0.203: IC1.7 13.82,20.04 13.36,19.58 12.95,19.58 12.54,19.17 12.54,18.8 12.49,18.75 C1.2
VCORE1
  Top 0.254: IC3.7 36.21,18.32 C20.2

## Text on the board
_tsilk: + | +
_bsilk: + | TOP | ON/OFF | CLR | CHG | PWR | MEM | ROCKET LOGGER | TX | C | MI | Rev. 1 | Jan 14 | Matt Brejza | SC | MO | RX | Rocket Altimeter | VCC | GND | SD | RST | ON/OFF | + | TST | V1 JAN 14 | PWR | CHG | M BREJZA